# EAGLE board Digital Controller PCB (EAGLE 6.5.0)
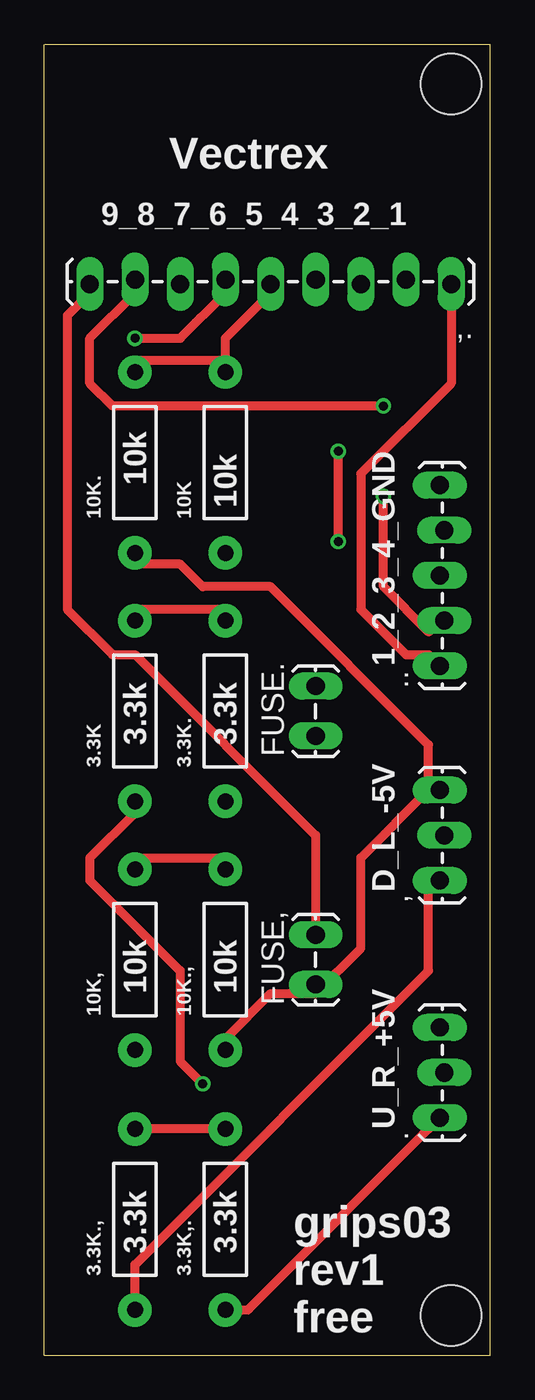
[diagram p0: board, top side]
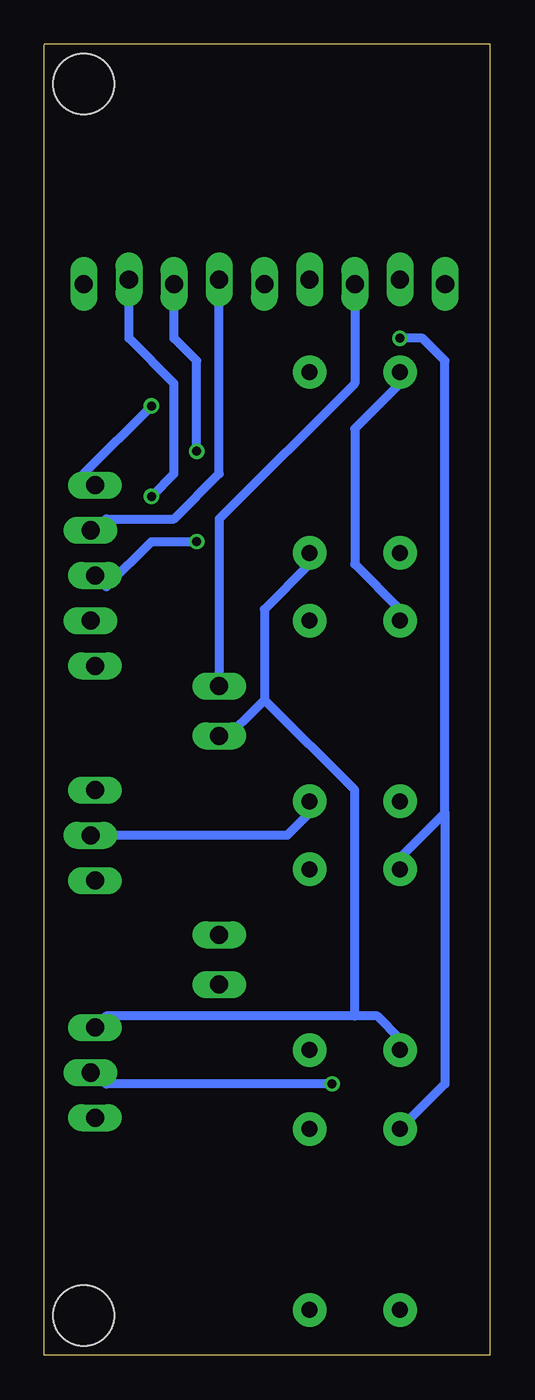
[diagram p1: board, bottom side, seen from below]

Size 25.08 x 73.66 mm. Coordinates in mm from the lower left corner, seen from the top.
Outline: 0.01,0 0,0
Outline: 0,0 0.01,0
Outline: 0.01,0 25.08,0 25.08,73.65
Outline: 0.01,73.66 25.08,73.66
Outline: 0,0 0,73.65
Copper layers (1*16): Top 0.0356mm / dielectric 1.5011mm / Bottom 0.0356mm
Design rules "LaenPCBOrder": minimum track width 6mil, minimum drill 13mil, track to track 6mil, track to pad 6mil, pad to pad 6mil, via to via 6mil, smd to smd 6mil, copper to edge 15mil, drill to drill 6mil, minimum pad ring 7mil, minimum via ring 7mil, stop-mask expansion 4mil, vias tented up to drill 0mil, thermal gap 10mil
Net classes: 0 default: width 0.508 mm, drill 0.508 mm, clearance 0.508 mm
Holes 3.43 mm at 22.87,71.44 22.87,2.22

## Footprints (pad centres in the part's own frame; a part is rotated, then mirrored left to right if it is on the bottom)
AXIAL-0.4 = drill 0.9 pad 1.88: P$1 -5.08,0; P$2 5.08,0
1X03_LOCK_LONGPADS = drill 1.016 long: 1 0,0; 2 2.54,-0.254; 3 5.08,0
1X09_LOCK_LONGPADS = drill 1.016 long: 1 0,0.127; 2 2.54,-0.127; 3 5.08,0.127; 4 7.62,-0.127; 5 10.16,0.127; 6 12.7,-0.127; 7 15.24,0.127; 8 17.78,-0.127; 9 20.32,0.127
1X05_LOCK_LONGPADS = drill 1.016 long: 1 0,0; 2 2.54,-0.254; 3 5.08,0; 4 7.62,-0.254; 5 10.16,0
1X02_LOCK_LONGPADS = drill 1.016 long: 1 -0.127,0; 2 2.667,0

## Placement (x,y rotation side)
3.3K  [AXIAL-0.4]  5.09,36.2 90 top
3.3K,.  [AXIAL-0.4]  10.17,7.62 90 top
3.3K.  [AXIAL-0.4]  10.17,36.2 90 top
3.3K.,  [AXIAL-0.4]  5.09,7.62 90 top
10K  [AXIAL-0.4]  10.17,50.16 90 top
10K,  [AXIAL-0.4]  5.09,22.23 90 top
10K.  [AXIAL-0.4]  5.09,50.16 90 top
10K.,  [AXIAL-0.4]  10.17,22.23 90 top
,  [1X03_LOCK_LONGPADS]  22.24,26.67 90 top
,.  M09LOCK-LONGPADS  [1X09_LOCK_LONGPADS]  22.87,60.33 180 top
.  [1X03_LOCK_LONGPADS]  22.24,13.34 90 top
..  [1X05_LOCK_LONGPADS]  22.24,38.73 90 top
FUSE,  M02LOCK_LONGPADS  [1X02_LOCK_LONGPADS]  15.25,20.95 90 top
FUSE.  M02LOCK_LONGPADS  [1X02_LOCK_LONGPADS]  15.25,34.92 90 top

## Library data of the parts
3.3K 3.3K,. 3.3K. 3.3K., 10K 10K, 10K. 10K., = SparkFun-Resistors
, ,. . .. FUSE, FUSE. = SparkFun-Connectors

## Nets
+5V: 10K,.P$1 10K.P$1 ..3 FUSE..1
+5V(7): ,..7 FUSE..2
-5V: 10K.,.P$1 10K..P$1 ,.3 FUSE,.1
-5V(9): ,..9 FUSE,.2
B1: ,..1 ...1
B2: ,..2 ...2
B3: ,..3 ...3
B4: ,..4 ...4
DOWN: 3.3K.,.P$1 ,.1
GND: ,..8 ...5
HPOT: 3.3K..P$2 3.3K.P$2 10K..P$2 10K.P$2 ,..5
LEFT: 3.3K..P$1 ,.2
RIGHT: 3.3K.P$1 ..2
UP: 3.3K,..P$1 ..1
VPOT: 3.3K,..P$2 3.3K.,.P$2 10K,.P$2 10K.,.P$2 ,..6

## Tracks (layer width: path | path; a pad name or v marks a point on that pad's centre or on a via)
+5V
  Bottom 0.508: 12.71,36.83 15.25,34.29 FUSE..1 | 12.71,36.83 12.71,41.91 10.17,44.45 10K.P$1 | 7.63,19.05 6.36,19.05 5.09,17.78 10K,.P$1 | 7.63,19.05 21.6,19.05 ..3 | 12.71,36.83 7.63,31.75 7.63,19.05
+5V(7)
  Bottom 0.508: FUSE..2 15.25,38.1 15.25,46.99 7.63,54.61 7.63,59.69 ,..7
-5V
  Top 0.508: 15.25,20.32 12.71,20.32 10.17,17.78 10K.,.P$1 | 15.25,20.32 FUSE,.1 15.25,20.32 | 21.6,31.75 17.79,27.94 17.79,22.86 15.25,20.32 | 21.6,31.75 ,.3 21.6,31.75 | 21.6,31.75 21.6,34.29 12.71,43.18 8.9,43.18 7.63,44.45 5.09,44.45 10K..P$1
-5V(9)
  Top 0.508: FUSE,.2 15.25,24.13 15.25,29.21 5.09,39.37 3.82,39.37 1.28,41.91 1.28,58.42 2.55,59.69 ,..9
B1
  Top 0.508: ...1 21.6,39.37 20.33,39.37 17.79,41.91 17.79,49.53 22.87,54.61 22.87,59.69 ,..1
B2  (via drill 0.51)
  Top 0.508: v19.06,48.26 19.06,43.18 21.6,40.64 ...2
  Bottom 0.508: v19.06,48.26 17.79,49.53 17.79,54.61 20.33,57.15 20.33,59.69 ,..2
B3  (via drill 0.51)
  Top 0.508: v16.52,45.72 v16.52,50.8
  Bottom 0.508: v16.52,50.8 16.52,55.88 17.79,57.15 17.79,59.69 ,..3 | v16.52,45.72 19.06,45.72 21.6,43.18 ...3
B4
  Bottom 0.508: ,..4 15.25,59.69 15.25,49.53 17.79,46.99 21.6,46.99 ...4
DOWN
  Top 0.508: 3.3K.,.P$1 5.09,5.08 21.6,21.59 21.6,26.67 ,.1
GND  (via drill 0.51)
  Top 0.508: v19.06,53.34 3.82,53.34 2.55,54.61 2.55,57.15 5.09,59.69 ,..8
  Bottom 0.508: v19.06,53.34 22.87,49.53 ...5
HPOT
  Top 0.508: 3.3K.P$2 5.09,41.91 10.17,41.91 3.3K..P$2 | 10.17,55.88 10.17,57.15 12.71,59.69 ,..5 | 10.17,55.88 10K.P$2 10.17,55.88 | 10.17,55.88 5.09,55.88 10K..P$2
  Bottom 0.508: 3.3K.P$2 5.09,41.91 7.63,44.45 7.63,52.07 5.09,54.61 10K..P$2
LEFT
  Bottom 0.508: ,.2 21.6,29.21 11.44,29.21 10.17,30.48 3.3K..P$1
RIGHT  (via drill 0.51)
  Top 0.508: v8.9,15.24 7.63,16.51 7.63,21.59 2.55,26.67 2.55,27.94 5.09,30.48 3.3K.P$1
  Bottom 0.508: v8.9,15.24 21.6,15.24 ..2
UP
  Top 0.508: 3.3K,..P$1 11.44,2.54 21.6,12.7 ..1
VPOT  (via drill 0.51)
  Top 0.508: 3.3K,..P$2 3.3K.,.P$2 | v5.09,57.15 7.63,57.15 10.17,59.69 ,..6 | 10K.,.P$2 10.17,27.94 5.09,27.94 10K,.P$2
  Bottom 0.508: v5.09,57.15 3.82,57.15 2.55,55.88 2.55,30.48 | 2.55,30.48 5.09,27.94 10K,.P$2 | 3.3K.,.P$2 2.55,15.24 2.55,30.48

## Text on the board
tNames: Vectrex | 9_8_7_6_5_4_3_2_1 | 10k | 10k | 1_2_3_4_GND | 3.3k | 3.3k | D_L_-5V | 10k | 10k | U_R_+5V | 3.3k | 3.3k | grips03 / rev1 / free